# Altium PCB Carrier_Board_Template.PcbDoc
Units mil, origin at the board's own origin, x right, y up, seen from the top; angles counter-clockwise.
Board outline 1968.5 x 1181.1 mil, 2 copper layers (Top Layer, Bottom Layer); 18 components, 35 nets, 107 pads, 29 vias.
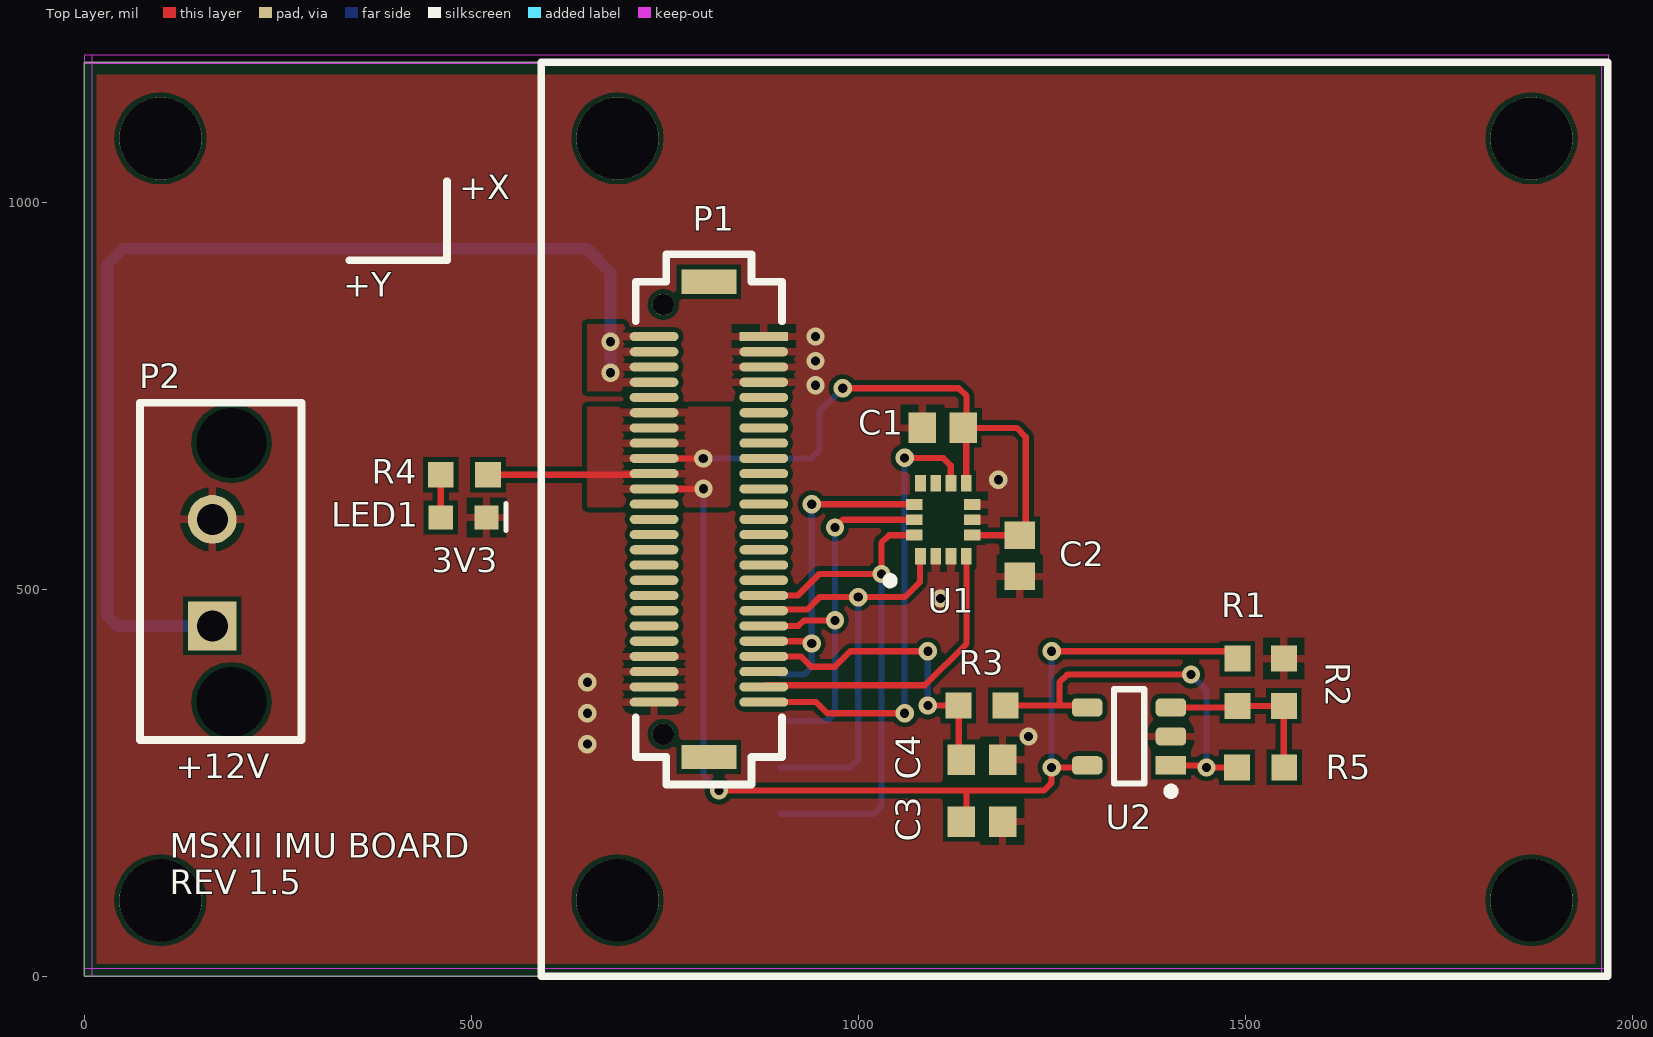
[diagram p0: Top Layer view]
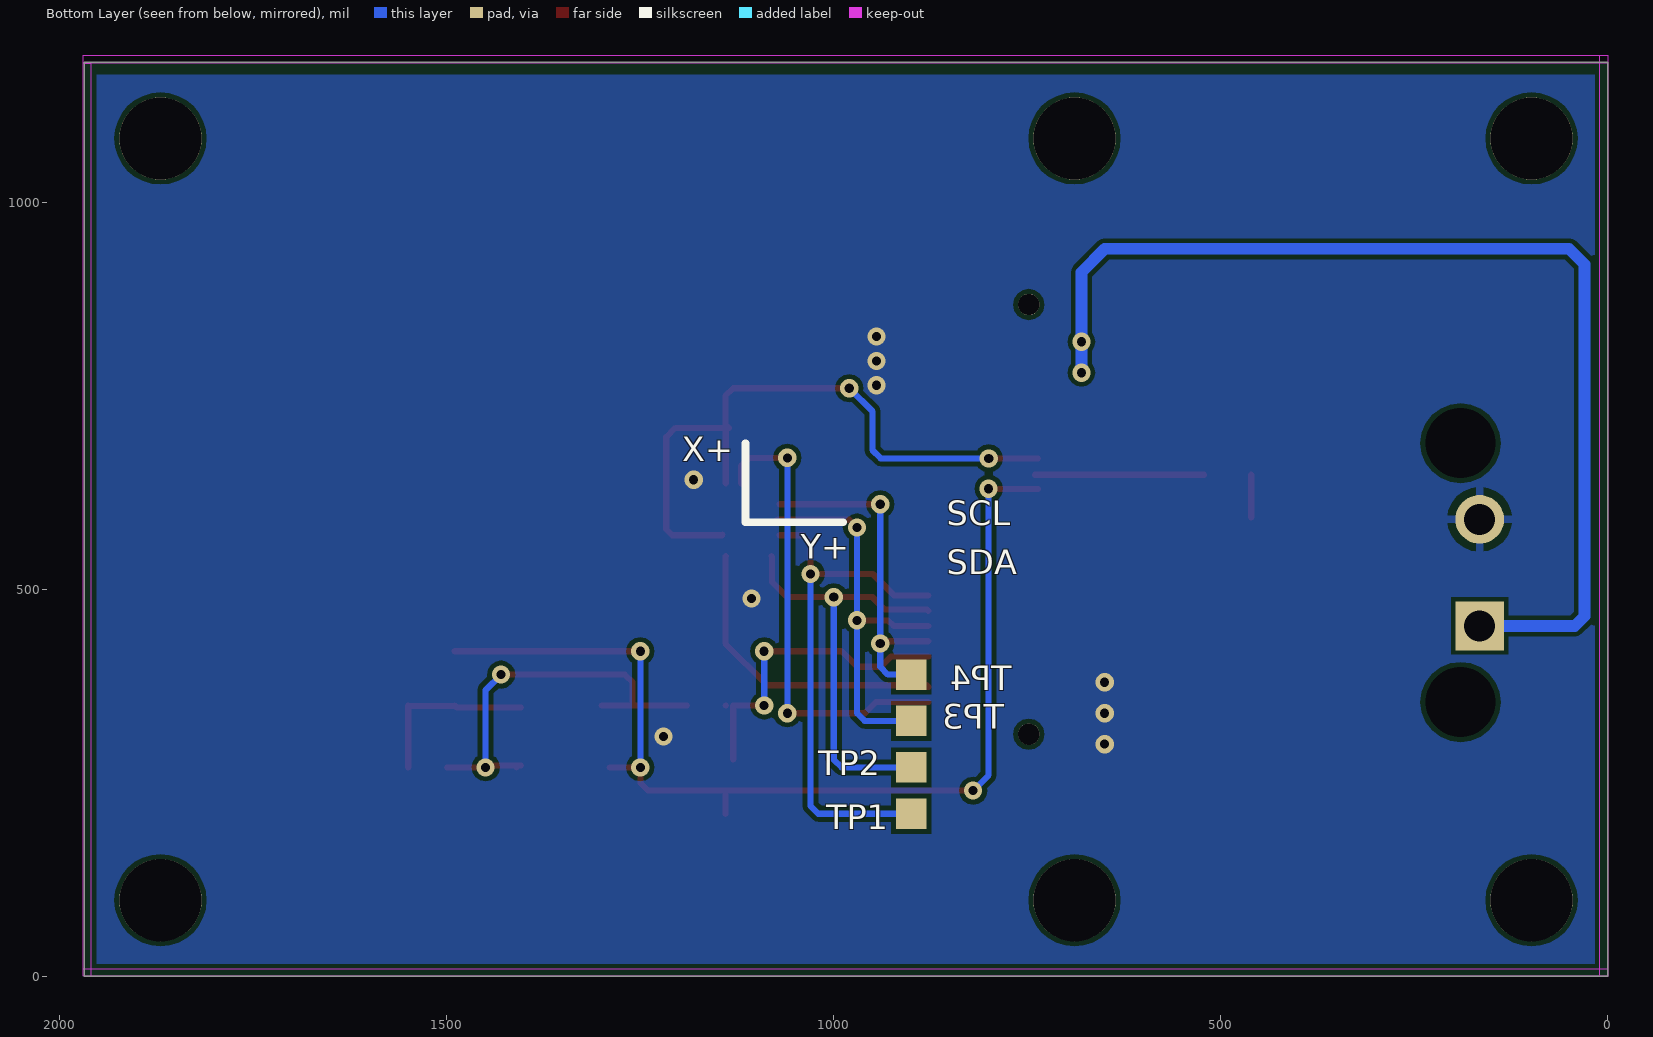
[diagram p1: Bottom Layer view, seen from below]
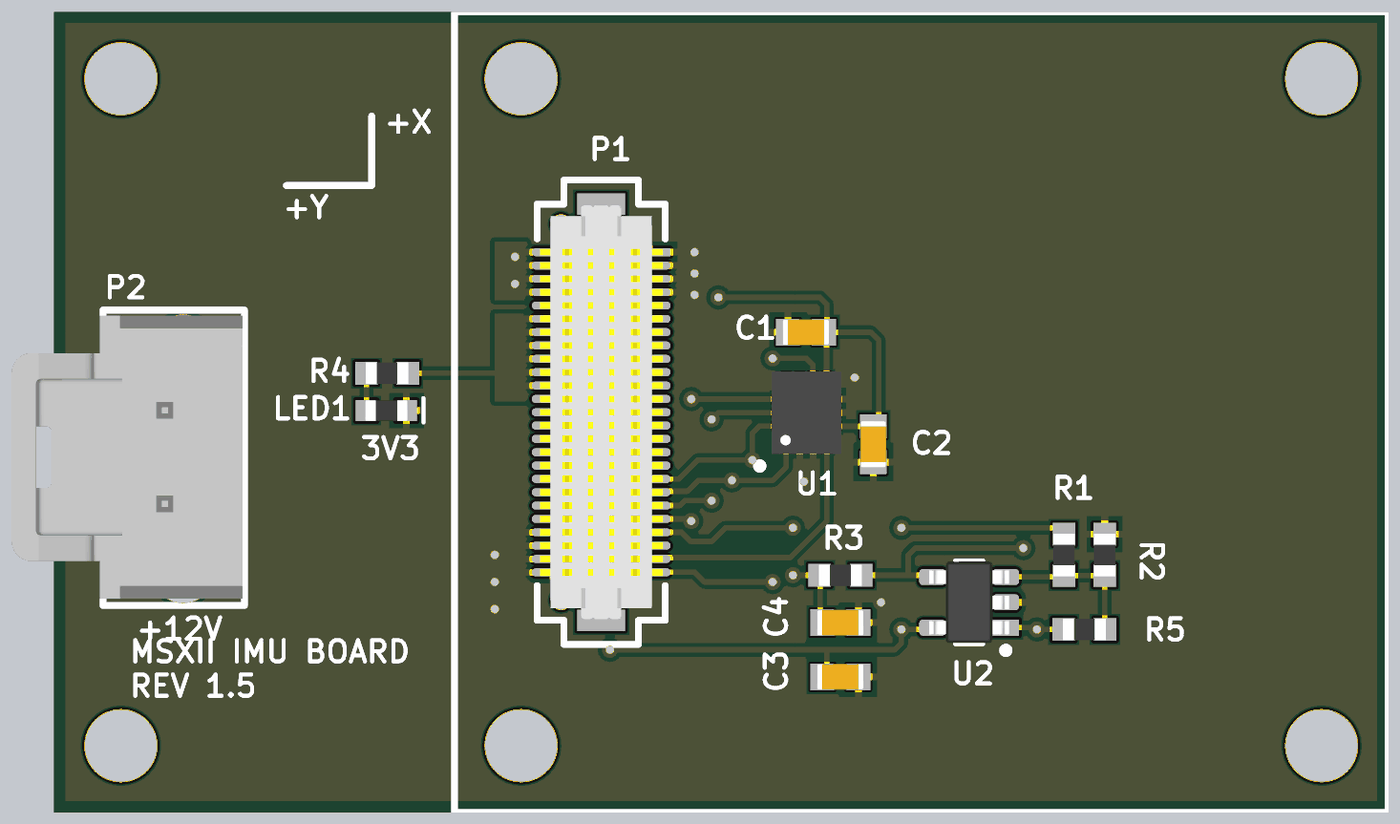
[diagram p2: 3D render of the assembled board from above, using the file's embedded part models]

## Layer stack, top to bottom
Top Solder: solder mask 0.4, Solder Resist, Dk 3.5
Top Layer: signal copper 1.4
Dielectric 1: dielectric 12.6, FR-4, Dk 4.8
Bottom Layer: signal copper 1.4
Bottom Solder: solder mask 0.4, Solder Resist, Dk 3.5

## Board outline
0,0 0,1181.1 1968.5,1181.1 1968.5,0

## Design rules (kind name [scope] priority, off if disabled: settings)
BoardOutlineClearance [All] p1: gap=16 ignorepadtopadclearanceinfootprint=FALSE
Clearance [All] p1: gap=6 ignorepadtopadclearanceinfootprint=TRUE except(0: Arc-Hole Track-Hole SMDPad-Hole THPad-Hole Via-Hole Fill-Hole Poly-Hole Region-Hole Text-Hole)
ComponentClearance ComponentClearance_ControllerBoard [InComponent('P1') vs Identifier = 'Controller-Board'] p1: gap=0 collisioncheckmode=3 verticalgap=0 showdistances=FALSE
ComponentClearance ComponentClearance_Standoffs [Identifier = 'Standoff' vs Identifier = 'Controller-Board'] p2: gap=0 collisioncheckmode=3 verticalgap=0 showdistances=FALSE
ComponentClearance [All] p3: gap=10 collisioncheckmode=3 verticalgap=10 showdistances=FALSE
HoleSize [All] p1: absolutevalues=TRUE maxlimit=248.03 minlimit=11.81 maxpercent=80.000 minpercent=20.000
MinimumAnnularRing [All] p1: minimumring=6
MinimumSolderMaskSliver [All] p1: minsoldermaskwidth=11.81
PolygonConnect [IsPad] p1: connectstyle=Relief reliefconductorwidth=10 reliefentries=4 polygonreliefangle="90 Angle" airgapwidth=10
PolygonConnect PolygonConnect_NoThermal [Not(IsPad)] p2: connectstyle=Direct reliefconductorwidth=10 reliefentries=4 polygonreliefangle="90 Angle" airgapwidth=10
RoutingVias [All] p1: holewidth=11.81 width=23.62 viastyle="Through Hole" minholewidth=11.81 minwidth=23.62 maxholewidth=28 maxwidth=50
SilkToSolderMaskClearance [IsPad] p1: minsilkscreentomaskgap=7 clearancetoexposedcopper=TRUE
SolderMaskExpansion [All] p1: expansion=4
Width [All] p1: maxlimit=100 minlimit=6 preferedwidth=7.99
26 further rules are at their usual default settings.

## Classes and differential pairs
component class IMU_Board: C1 C2 C3 C4 LED1 P2 R1 R2 R3 R4 R5 TP1 TP2 TP3 TP4 U1 U2
component class Controller_Board_Interface: P1

## Components (designator, comment, footprint, x,y, rotation, side; value= is the part's Value field where it differs from the comment)
C1 "CAP CER 0.1UF 50V 10% X7R 0603" "CAP, 0603" 1109.25,708.66 r180 top
C2 "CAP CER 0.1UF 50V 10% X7R 0603" "CAP, 0603" 1208.66,543.31 r270 top
C3 "CAP CER 0.1UF 50V 10% X7R 0603" "CAP, 0603" 1160,200 r0 top
C4 "CAP CER 10nF 50V 5% X7R 0603" "CAP, 0603" 1160,280 r0 top
LED1 "LED GREEN CLEAR 2V 0603" LED_0603 462.6,592.6 r0 top
P1 "CONN 50POS Bergstak Plug 0.02\"" "CONN, BERGSTAK 50 POS PLUG" 807.09,590.55 r0 top locked
P2 "CONN 2POS ULTRA-FIT 0.138\"" "CONN, 2POS ULTRA-FIT" 165.35,452.76 r90 top
R1 "NTC THERMISTORS 10KOHM 1608 SMD" "RES, 0603" 1490,380 r270 top
R2 "RES 10K OHM 1% 1/10W 0603" "RES, 0603" 1550,380 r270 top
R3 "RES 0.0 OHM 1/4W 0603" "RES, 0603" 1160,350 r180 top
R4 "RES 604 OHM 1% 1/10W 0603" "RES, 0603" 491.14,648.11 r180 top
R5 "RES 0.0 OHM 1/4W 0603" "RES, 0603" 1520,270 r180 top
TP1 "Test Point" "Test Point" 900,210 r90 bottom
TP2 "Test Point" "Test Point" 900,270 r90 bottom
TP3 "Test Point" "Test Point" 900,330 r90 bottom
TP4 "Test Point" "Test Point" 900,390 r90 bottom
U1 "IC SENSOR IMU LGA-14L" "IC SENSOR IMU LGA-14L" 1110,590 r90 top
U2 "IC OP AMP GEN PURPOSE RR 10MHZ SOT-23-5" "IC OP AMP GP RR 10MHZ SOT-23-5" 1350,310 r180 top

## Footprints (in the part's own frame and the unit in brackets; to place one, negate y for a bottom-side part, rotate by r counter-clockwise, add the part's x,y. Pads: shape width x height; smd on the part's side, far side on the other; paste and mask are expansions set on the pad)
"CAP, 0603" [mm] "Chip Capacitor, 2-Leads, Body 1.60x0.81mm, IPC Medium Density"
  rect 0.9x1 smd mask+0.076: 1(-0.675,0) 2(0.675,0)
  body extent -0.87,-0.48 0.87,0.48, height 0.9
"CONN, 2POS ULTRA-FIT" [mm] "2 Positions Header, Shrouded Connector 0.138\" (3.50mm) Through Hole Gold"
  rect 1.6x1.6 hole 1.02: 1(0,0)
  round 1.6 hole 1.02: 2(3.5,0)
  round 1.6 hole 2.3: ""(-2.5,-0.63) ""(6,-0.63)
  silkscreen extent -3.74,-2.93 7.33,2.37, body extent -3.48,-2.87 7.12,5.79, height 13.85
"CONN, BERGSTAK 50 POS PLUG" [mm] "Bergstak 50 Position Plug"
  rect 1.6x0.3 smd: 1(1.8,6)
  oval 1.6x0.3 smd: 2(1.8,5.5) 3(1.8,5) 4(1.8,4.5) 5(1.8,4) 6(1.8,3.5) 7(1.8,3) 8(1.8,2.5) 9(1.8,2) 10(1.8,1.5) 11(1.8,1) 12(1.8,0.5) 13(1.8,0) 14(1.8,-0.5) 15(1.8,-1) 16(1.8,-1.5) 17(1.8,-2) 18(1.8,-2.5) 19(1.8,-3) 20(1.8,-3.5) 21(1.8,-4) 22(1.8,-4.5) 23(1.8,-5) 24(1.8,-5.5) 25(1.8,-6) 26(-1.8,-6) 27(-1.8,-5.5) 28(-1.8,-5) 29(-1.8,-4.5) 30(-1.8,-4) 31(-1.8,-3.5) 32(-1.8,-3) 33(-1.8,-2.5) 34(-1.8,-2) 35(-1.8,-1.5) 36(-1.8,-1) 37(-1.8,-0.5) 38(-1.8,0) 39(-1.8,0.5) 40(-1.8,1) 41(-1.8,1.5) 42(-1.8,2) 43(-1.8,2.5) 44(-1.8,3) 45(-1.8,3.5) 46(-1.8,4) 47(-1.8,4.5) 48(-1.8,5) 49(-1.8,5.5) 50(-1.8,6)
  round 0.7 hole 0.7: ""(-1.5,-7.05) ""(-1.5,7.05)
  rect 1.8x0.8 smd: ""(0,-7.8) ""(0,7.8)
  silkscreen extent -2.4,-8.7 2.4,8.7, body extent -2.3,-7.75 2.3,7.75, height 4.2
"IC OP AMP GP RR 10MHZ SOT-23-5" [mm] "SOT23, 5-Leads, Body 2.90x2.80mm, Pitch 0.95mm, IPC Medium Density"
  rect 1x0.6 smd: 1(-1.375,0.95)
  rrect50% 1x0.6 smd: 2(-1.375,0) 3(-1.375,-0.95) 4(1.375,-0.95) 5(1.375,0.95)
  silkscreen extent -1.5,-1.55 0.5,1.92, body extent -1.5,-1.53 1.5,1.53, height 1.45
"IC SENSOR IMU LGA-14L" [mm] "PQFN, 14-Leads, Body 3.00x2.50mm, Pitch 0.50mm, IPC Medium Density"
  rect 0.55x0.35 smd: 1(-1.2,0.75) 2(-1.2,0.25) 3(-1.2,-0.25) 4(-1.2,-0.75) 8(1.2,-0.75) 9(1.2,-0.25) 10(1.2,0.25) 11(1.2,0.75)
  rect 0.35x0.55 smd: 5(-0.5,-0.95) 6(0,-0.95) 7(0.5,-0.95) 12(0.5,0.95) 13(0,0.95) 14(-0.5,0.95)
  silkscreen extent -2.12,1.63 -1.88,1.87, body extent -1.55,-1.3 1.55,1.3, height 0.86
LED_0603 [mm]
  rect 0.8x0.8 smd: 1(-0.05,0.01) 2(1.45,0.01)
  silkscreen extent 2.09,-0.43 2.09,0.48, body extent -0.1,-0.39 1.5,0.41, height 0.55
"RES, 0603" [mm] "Chip Resistor, 2-Leads, Body 1.60x0.80mm, IPC Medium Density"
  rect 0.85x0.85 smd: 1(-0.775,0) 2(0.775,0)
  body extent -0.8,-0.4 0.8,0.4, height 0.55
"Test Point" [mm]
  rect 1x1 smd: TP(0,0)

## Part data
C1 C2 C3: "0.10µF ±10% 50V Ceramic Capacitor X7R 0603 (1608 Metric)", Capacitance=0.1µF, Manufacturer 1="AVX Corporation", Manufacturer Part Number 1=06035C104KAT2A, Operating Temperature="-55°C ~ 125°C", Package / Case="0603 (1608 Metric)", Ratings=-, Supplier Part Number 1=478-5052-1-ND, Temperature Coefficient=X7R, Tolerance=±10%, Voltage=50V, ComponentLink1Description=http://datasheets.avx.com/X7RDielectric.pdf, ComponentLink1URL=http://datasheets.avx.com/X7RDielectric.pdf, Height - Seated (Max)=-, Lead Spacing=-, Lead Style=-, Mounting Type="Surface Mount, MLCC", Packaging="Cut Tape (CT)", Part Status=Active, Size / Dimension="0.063\" L x 0.032\" W (1.60mm x 0.81mm)", Supplier 1=Digi-Key, Thickness (Max)="0.035\" (0.90mm)"
C4: "10000pF ±5% 50V Ceramic Capacitor U2J 0603 (1608 Metric)", Capacitance=10000pF, Manufacturer 1=KEMET, Manufacturer Part Number 1=C0603C103J5JAC7867, Operating Temperature="-55°C ~ 125°C", Package / Case="0603 (1608 Metric)", Ratings=-, Supplier Part Number 1=399-13384-1-ND, Temperature Coefficient=U2J, Tolerance=±5%, Voltage=50V, ComponentLink1Description=http://www.kemet.com/docfinder?Partnumber=C0603C103J5JAC7867, ComponentLink1URL=http://www.kemet.com/docfinder?Partnumber=C0603C103J5JAC7867, Failure Rate=-, Height - Seated (Max)=-, Lead Spacing=-, Lead Style=-, Mounting Type="Surface Mount, MLCC", Packaging="Cut Tape (CT)", Part Status=Active, Size / Dimension="0.063\" L x 0.032\" W (1.60mm x 0.80mm)", Supplier 1=Digi-Key, Thickness (Max)="0.034\" (0.87mm)"
LED1: "Green 572nm LED Indication - Discrete 2V 0603 (1608 Metric)", Color=Green, Current - Test=20mA, Lens Color=Colorless, Manufacturer="Wurth Electronics Inc.", Manufacturer Part Number=150060VS75000, Millicandela Rating=40mcd, Package / Case="0603 (1608 Metric)", Supplier Device Package=0603, Supplier Part Number 1=732-4980-1-ND, Voltage - Forward (Vf) (Typ)=2V, Category=Optoelectronics, ComponentLink1Description=http://katalog.we-online.de/led/datasheet/150060VS75000.pdf, ComponentLink1URL=http://katalog.we-online.de/led/datasheet/150060VS75000.pdf, Features=-, Height (Max)=0.80mm, Lens Style/Size="Rectangle with Flat Top, 1.10mm x 0.70mm", Lens Transparency=Clear, Mounting Type="Surface Mount", Packaging="Cut Tape (CT)", Part Status=Active, Pricing 1="1=0.21, 100=0.1617, 500=0.13964 (CAD)", RoHS="RoHS Compliant", Size / Dimension="1.60mm L x 0.80mm W", Stock 1=9408, Supplier 1=Digi-Key, Viewing Angle=140°, Wavelength - Dominant=570nm, Wavelength - Peak=572nm
P1: "50 Position Connector Plug, Outer Shroud Contacts Surface Mount Gold", Manufacturer 1="Amphenol FCI", Manufacturer Part Number 1=10132797-055100LF, Supplier Part Number 1=609-5226-1-ND, ComponentLink1Description=http://portal.fciconnect.com/Comergent//fci/drawing/10132797.pdf, ComponentLink1URL=http://portal.fciconnect.com/Comergent//fci/drawing/10132797.pdf, Connector Type="Plug, Outer Shroud Contacts", Contact Finish=Gold, Contact Finish Thickness="1µin (0.025µm)", Height Above Board="0.169\" (4.30mm)", Mated Stacking Heights=5mm, Mounting Type="Surface Mount", Number of Positions=50, Number of Rows=2, Packaging="Cut Tape (CT)", Part Status=Active, Pitch="0.020\" (0.50mm)", Series="BergStak Plug", Supplier 1=Digi-Key
P2: "2 Positions Header, Shrouded Connector 0.138\" (3.50mm) Through Hole Gold", Current Rating=-, Insulation Color=Black, Manufacturer 1="Molex, LLC", Manufacturer Part Number 1=1722861302, Material Flammability Rating="UL94 V-0", Operating Temperature="-40°C ~ 120°C", Supplier Part Number 1=WM11673-ND, Voltage=400V, ComponentLink1Description=http://www.molex.com/pdm_docs/sd/1722861302_sd.pdf, ComponentLink1URL=http://www.molex.com/pdm_docs/sd/1722861302_sd.pdf, Connector Type=Header, Contact Finish - Mating=Gold, Contact Finish - Post=Tin, Contact Finish Thickness - Mating="30µin (0.76µm)", Contact Finish Thickness - Post="60µin (1.52µm)", Contact Length - Mating=-, Contact Length - Post="0.126\" (3.20mm)", Contact Material="Copper Alloy", Contact Shape=Square, Contact Type="Male Pin", Fastening Type="Latch Holder", Ingress Protection=-, Insulation Height="0.465\" (11.80mm)", Insulation Material="Liquid Crystal Polymer (LCP)", Mated Stacking Heights=26.99mm, Mounting Type="Through Hole", Number of Positions=2, Number of Positions Loaded=All, Number of Rows=1, Overall Contact Length=-, Packaging=Tray, Part Status=Active, Pitch - Mating="0.138\" (3.50mm)", Row Spacing - Mating=-, Series=UltraFit, Shrouding="Shrouded - 4 Wall", Style="Board to Board or Cable", Supplier 1=Digi-Key, Termination="Kinked Pin, Solder"
R1: B Value Tolerance=±1%, Manufacturer="Murata Electronics North America", Manufacturer Part Number=NCU18XH103F60RB, Operating Temperature="-40°C ~ 125°C", Package / Case="0603 (1608 Metric)", Resistance in Ohms @ 25°C=10k, B0/50=-, B25/50=3380K, B25/75=-, B25/85=3434K, B25/100=3455K, Category="Sensors, Transducers", ComponentLink1Description=https://www.murata.com/~/media/webrenewal/support/library/catalog/products/thermistor/r03e.ashx, ComponentLink1URL=https://www.murata.com/~/media/webrenewal/support/library/catalog/products/thermistor/r03e.ashx, Length - Lead Wire=-, Mounting Type="Surface Mount", Packaging="Tape & Reel (TR)", Part Status=Active, Pricing 1="4000=0.06734, 8000=0.05942, 12000=0.05744, 20000=0.05645, 28000=0.05546 (CAD)", Resistance Tolerance=±1%, RoHS="Request Inventory Verification", Stock 1=4000, Supplier 1=Digi-Key
R2: "RES SMD 10K OHM 1% 1/10W 0603", Manufacturer 1=Yageo, Manufacturer Part Number 1=RC0603FR-0710KL, Operating Temperature="-55°C ~ 155°C", Package / Case="0603 (1608 Metric)", Power=1/10W, Resistance=10k, Supplier Device Package=0603, Supplier Part Number 1=311-10.0KHRCT-ND, Temperature Coefficient=±100ppm/°C, Tolerance=±1%, ComponentLink1Description=http://www.yageo.com/documents/recent/PYu-RC_Group_51_RoHS_L_7.pdf, ComponentLink1URL=http://www.yageo.com/documents/recent/PYu-RC_Group_51_RoHS_L_7.pdf, Composition="Thick Film", Failure Rate=-, Height - Seated (Max)="0.022\" (0.55mm)", Packaging="Cut Tape (CT)", Part Status=Active, Size / Dimension="0.063\" L x 0.031\" W (1.60mm x 0.80mm)", Supplier 1=Digi-Key
R3 R5: "RES SMD 0.0 OHM JUMPER 1/4W 0603", Manufacturer 1="Vishay Dale", Manufacturer Part Number 1=CRCW06030000Z0EAHP, Operating Temperature="-55°C ~ 155°C", Package / Case="0603 (1608 Metric)", Power (Watts)=1/4W, Resistance=0.0, Supplier Device Package=0603, Supplier Part Number 1=541-0.0SBCT-ND, ComponentLink1Description=http://www.vishay.com/docs/20043/crcwhpe3.pdf, ComponentLink1URL=http://www.vishay.com/docs/20043/crcwhpe3.pdf, Composition="Thick Film", Failure Rate=-, Height - Seated (Max)="0.022\" (0.55mm)", Packaging="Cut Tape (CT)", Part Status=Active, Size / Dimension="0.063\" L x 0.033\" W (1.60mm x 0.85mm)", Supplier 1=Digi-Key
R4: "RES SMD 604 OHM 1% 1/10W 0603", Manufacturer 1=Yageo, Manufacturer Part Number 1=RC0603FR-07604RL, Operating Temperature="-55°C ~ 155°C", Package / Case="0603 (1608 Metric)", Power=1/10W, Resistance=604, Supplier Device Package=0603, Supplier Part Number 1=311-604HRCT-ND, Temperature Coefficient=±100ppm/°C, Tolerance=±1%, ComponentLink1Description=http://www.yageo.com/documents/recent/PYu-RC_Group_51_RoHS_L_7.pdf, ComponentLink1URL=http://www.yageo.com/documents/recent/PYu-RC_Group_51_RoHS_L_7.pdf, Composition="Thick Film", Failure Rate=-, Height - Seated (Max)="0.022\" (0.55mm)", Packaging="Cut Tape (CT)", Part Status=Active, Size / Dimension="0.063\" L x 0.031\" W (1.60mm x 0.80mm)", Supplier 1=Digi-Key
U1: "Accelerometer, Gyroscope, 3 Axis Sensor I²C, SPI Output", Manufacturer=STMicroelectronics, Manufacturer Part Number=LSM6DS3USTR, Operating Temperature="-40°C ~ 85°C (TA)", Supplier Part Number 1=497-16910-1-ND, Category="Sensors, Transducers", ComponentLink1Description=http://www.st.com/content/ccc/resource/technical/document/datasheet/group0/2e/84/27/34/60/8d/49/f2/DM00237513/files/DM00237513.pdf/jcr:content/translations/en.DM00237513.pdf, ComponentLink1URL=http://www.st.com/content/ccc/resource/technical/document/datasheet/group0/2e/84/27/34/60/8d/49/f2/DM00237513/files/DM00237513.pdf/jcr:content/translations/en.DM00237513.pdf, Output Type="I²C, SPI", Part Status=Active, Pricing 1="1=4.3, 10=3.858, 100=3.1606, 500=2.69052, 1000=2.26912 (CAD)", RoHS="RoHS Compliant", Sensor Type="Accelerometer, Gyroscope, 3 Axis", Stock 1=23614, Supplier 1=Digi-Key
U2: "General Purpose Amplifier 1 Circuit Rail-to-Rail SOT-23-5", Current - Output / Channel=50mA, Current - Supply=400µA, Manufacturer 1="Texas Instruments", Manufacturer Part Number 1=TLV316QDBVRQ1, Operating Temperature="-40°C ~ 125°C", Package / Case="SC-74A, SOT-753", Supplier Device Package=SOT-23-5, Supplier Part Number 1=296-45323-1-ND, Voltage - Supply, Single/Dual (±)="1.8 V ~ 5.5 V, ±0.9 V ~ 2.75 V", -3db Bandwidth=-, Amplifier Type="General Purpose", Category="Integrated Circuits (ICs)", ComponentLink1Description=http://www.ti.com/lit/ds/symlink/tlv316-q1.pdf, ComponentLink1URL=http://www.ti.com/lit/ds/symlink/tlv316-q1.pdf, Description 1="IC OP AMP GP RR 10MHZ 5-SOT-23", Mounting Type="Surface Mount", Number of Circuits=1, Output Type=Rail-to-Rail, Packaging="Cut Tape (CT)", Part Status=Active, Pricing 1="1=1.33, 10=1.185, 100=0.9234, 500=0.76276, 1000=0.60218 (CAD)", RoHS="RoHS Compliant", Slew Rate="6 V/µs", Stock 1=1747, Supplier 1=Digi-Key

## Free pads (board coordinates)
  round 106.3 hole 106.3: ""(98.43,98.43) ""(98.43,1082.68) ""(688.98,98.43) ""(688.98,1082.68) ""(1870.08,98.43) ""(1870.08,1082.68)

## Via types
v1: diameter 23.62, hole 11.81, Top Layer to Bottom Layer, tented both sides, 29 vias

## Nets (pads, with @x,y where several pads share a name; then routed paths per layer and width w, separated by ;. In a path a pad name is that pad's centre, name@x,y a point inside that pad or via, vN(x,y) a via of type N, cw(c..) or ccw(c..) an arc to the next point about the centre after c; other vN are vias at no path point)
3V3: C1.1 C2.1 C3.1 P1.40 P1.41 P1.42 P1.43 P1.44 P1.45 R1.1 R4.1 U1.5 U1.8 U2.5 | length 2466.6
  Top Layer w7.99: R4.1 P1.41@740,648.11 ; P1.40 799.92,629.92 v1(800,630) ; P1.42 v1(799.84,669.29) ; v1(820,240) 1140,240 ; v1(980,760) 1130,760 1140,750 1140,712.83 C1.1 ; U1.8 1139.53,704.96 C1.1 ; C3.1@1140,210 1140,240 ; U1.5@1143.7,570.87 1144.68,569.88 C2.1 1216.54,577.76 1216.54,696.85 1204.73,708.66 C1.1 ; v1(1250,420) R1.1@1490,420 ; U2.5@1290,270 v1(1250,270) 1250,250 1240,240 1140,240
  Bottom Layer w7.99: v1(799.84,669.29) 939.29,669.29 950,680 950,730 v1(980,760) ; v1(800,630) 800,260 v1(820,240) ; v1(1250,270) v1(1250,420)
+12V: P1.47 P1.48 P1.49 P1.50 P2.1 | length 1400.2
  Bottom Layer w7.99: 30,465.51 30,470 ; v1@680,775.67 v1(680,780)
  Bottom Layer w15: 30,465.51 42.76,452.76 P2.1 ; 30,470 30,920 50,940 650,940 680,910 v1(680,820) v1(680,780)
GND: C1.2 C2.2 C3.2 C4.2 LED1.2 P1.1 P1.2 P1.3 P1.4 P1.26 P1.27 P1.28 P1.29 P2.2 R2.1 U1.2 U1.3 U1.6 U1.7 U2.2
  other v1: 650,300 1220,310 650,340 650,380 1106.3,488.19 1181.1,641.73 944.88,763.78 944.88,795.28 944.88,826.77
NetLED1_1: LED1.1 R4.2 | length 55.1
  Top Layer w7.99: LED1.1 R4.2
NetR1_2: R1.2 R2.2 R5.1 U2.3 | length 226.6
  Top Layer w7.99: U2.3 1487.4,347.4 R1.2@1490,350 ; R1.2 1549.49,349.49 R2.2@1550,350 ; R5.1@1550,270 R2.2
NetR3_1: R3.1 R5.2 U2.1 U2.4 | length 543
  Top Layer w7.99: R3.1@1190,350 R3.1 1260,350 ; U2.4@1300,350 1260,350 ; U2.1 U2.1@1407.4,272.6 ; U2.1@1410,270 U2.1@1407.4,272.6 ; v1(1430,390) 1270,390 1260,380 1260,350 ; R5.2@1500,270 R5.2 v1(1450,270) 1447.4,272.6 U2.1@1407.4,272.6
  Bottom Layer w7.99: v1(1430,390) 1450,370 v1(1450,270)
PA0/IMU_INT2: P1.25 U1.9 | length 605
  Top Layer w7.99: P1.25 945.67,354.33 960,340 v1(1060,340) ; v1(1060,670) 1109.53,670 ; 1110,670 1109.53,670 ; U1.9 1119.53,637.56 1119.53,660 1109.53,670
  Bottom Layer w7.99: v1(1060,340) v1(1060,670)
PA1/IMU_INT1: P1.24 U1.4 | length 398.2
  Top Layer w7.99: P1.24 880.07,376.14 1086.14,376.14 1140,430 1140,542.28 U1.4
PA2/AN2/USART2_TX_1: P1.23
PA3/IMU_TEMP_SENSE: C4.1 P1.22 R3.2 | length 406.4
  Top Layer w7.99: P1.22 925.77,413.39 939.16,400 970,400 990,420 v1(1090,420) ; v1(1090,350) R3.2 1130,350 C4.1@1130,280 ; R3.2@1139.49,350 R3.2@1140,350
  Bottom Layer w7.99: v1(1090,350) v1(1090,420)
PA4/IMU_SPI1_NSS: P1.21 TP4.TP U1.12 | length 447.5
  Top Layer w7.99: P1.21 936.93,433.07 v1(940,430) ; v1(940,610) U1.12@1070,610
  Bottom Layer w7.99: TP4.TP 930,390 940,400 v1(940,430) v1(940,610)
PA5/IMU_SPI1_SCK: P1.20 TP3.TP U1.13 | length 515.9
  Top Layer w7.99: P1.20 922.76,452.76 930,460 v1(970,460) ; v1(970,580) 980,590 U1.13
  Bottom Layer w7.99: TP3.TP 960,330 970,340 v1(970,460) v1(970,580)
PA6/IMU_SPI1_MISO: P1.19 TP2.TP U1.1 | length 562.4
  Top Layer w7.99: P1.19 879.5,473.99 933.99,473.99 950,490 v1(1000,490) 1060,490 1080,510 U1.1@1080,540 ; U1.1@1080,542.28 U1.1
  Bottom Layer w7.99: TP2.TP 990,270 1000,280 v1(1000,490)
PA7/IMU_SPI1_MOSI: P1.18 TP1.TP U1.14 | length 681.9
  Top Layer w7.99: P1.18 922.13,492.13 950,520 v1(1030,520) 1030,560 1040,570 U1.14@1070,570
  Bottom Layer w7.99: TP1.TP 1020,210 1030,220 v1(1030,520)
PA8_1: P1.7
PA9_1: P1.6
PA10_1: P1.5
PA15/LED_RED_1: P1.39
PB0/AN8_1: P1.17
PB1/AN9_1: P1.16
PB2_1: P1.15
PB3/LED_GREEN_1: P1.38
PB4/LED_BLUE_1: P1.37
PB5/LED_BLUE_1: P1.36
PB6/USART1_TX_1: P1.34
PB7/USART1_RX_1: P1.33
PB8/I2C1_SCL_1: P1.32
PB9/I2C1_SDA_1: P1.31
PB10/USART3_TX/I2C2_SCL_1: P1.14
PB11/USART3_RX/I2C2_SDA_1: P1.13
PB12/SPI2_NSS_1: P1.11
PB13/SPI2_SCK_1: P1.10
PB14/SPI2_MISO_1: P1.9
PB15/SPI2_MOSI_1: P1.8
PC13_1: P1.30
pads on no net: P1. P1.12 P1.35 P1.46 P2. U1.10 U1.11

## Polygon pours and split planes (outlines as drawn)
GND on Top Layer "GND_L01_P006" (solid, pour order 6): 0,1181.1 0,0 1968.5,0 1968.5,1181.1
3V3 on Top Layer "3V3_L01_P002" (solid, pour order 2): 649.61,736.22 649.61,606.32 834.65,606.16 834.65,736.22
+12V on Top Layer "+12V_L01_P000" (solid, pour order 0): 649.61,842.52 649.61,755.91 787.4,755.91 787.4,842.52
GND on Bottom Layer "GND_L02_P004" (solid, pour order 4): 0,1181.1 0,0 1968.5,0 1968.5,1181.1

## Keep-outs
Keep-Out Layer:
  rectangle: 0,0 10,1190
  rectangle: 0,1180 1970,1190
  rectangle: 1960,0 1970,1180
  rectangle: 0,0 1970,10

## Silkscreen, mask and mechanical layers (free items; w line width, h text height)
Top Overlay:
  lines w10: 342.52,925.2 468.5,925.2 468.5,1027.56 ; 590.55,0 590.55,1181.1 1968.5,1181.1 1968.5,0 590.55,0
  text "+X" at 484.25,1003.94 h31.5
  text "+Y" at 334.65,877.95 h31.5
  text "3V3" at 448.82,522.13 h31.5
  text "+12V" at 118.11,255.91 h31.5
  text "MSXII IMU BOARD / REV 1.5" at 110.24,106.3 h31.5
Bottom Overlay:
  lines w10: 988.19,586.61 1114.17,586.61 1114.17,688.98
  text "+X" at 1129.92,665.35 h31.5
  text "SCL" at 854.33,582.68 h31.5
  text "+Y" at 980.31,539.37 h31.5
  text "SDA" at 854.33,519.69 h31.5